# Altium PCB PHY_Demo.PcbDoc
Units mil, origin at the board's own origin, x right, y up, seen from the top; angles counter-clockwise.
Board outline 3150 x 1890 mil, 2 copper layers (Top Layer, Bottom Layer); 52 components, 54 nets, 192 pads, 43 vias.
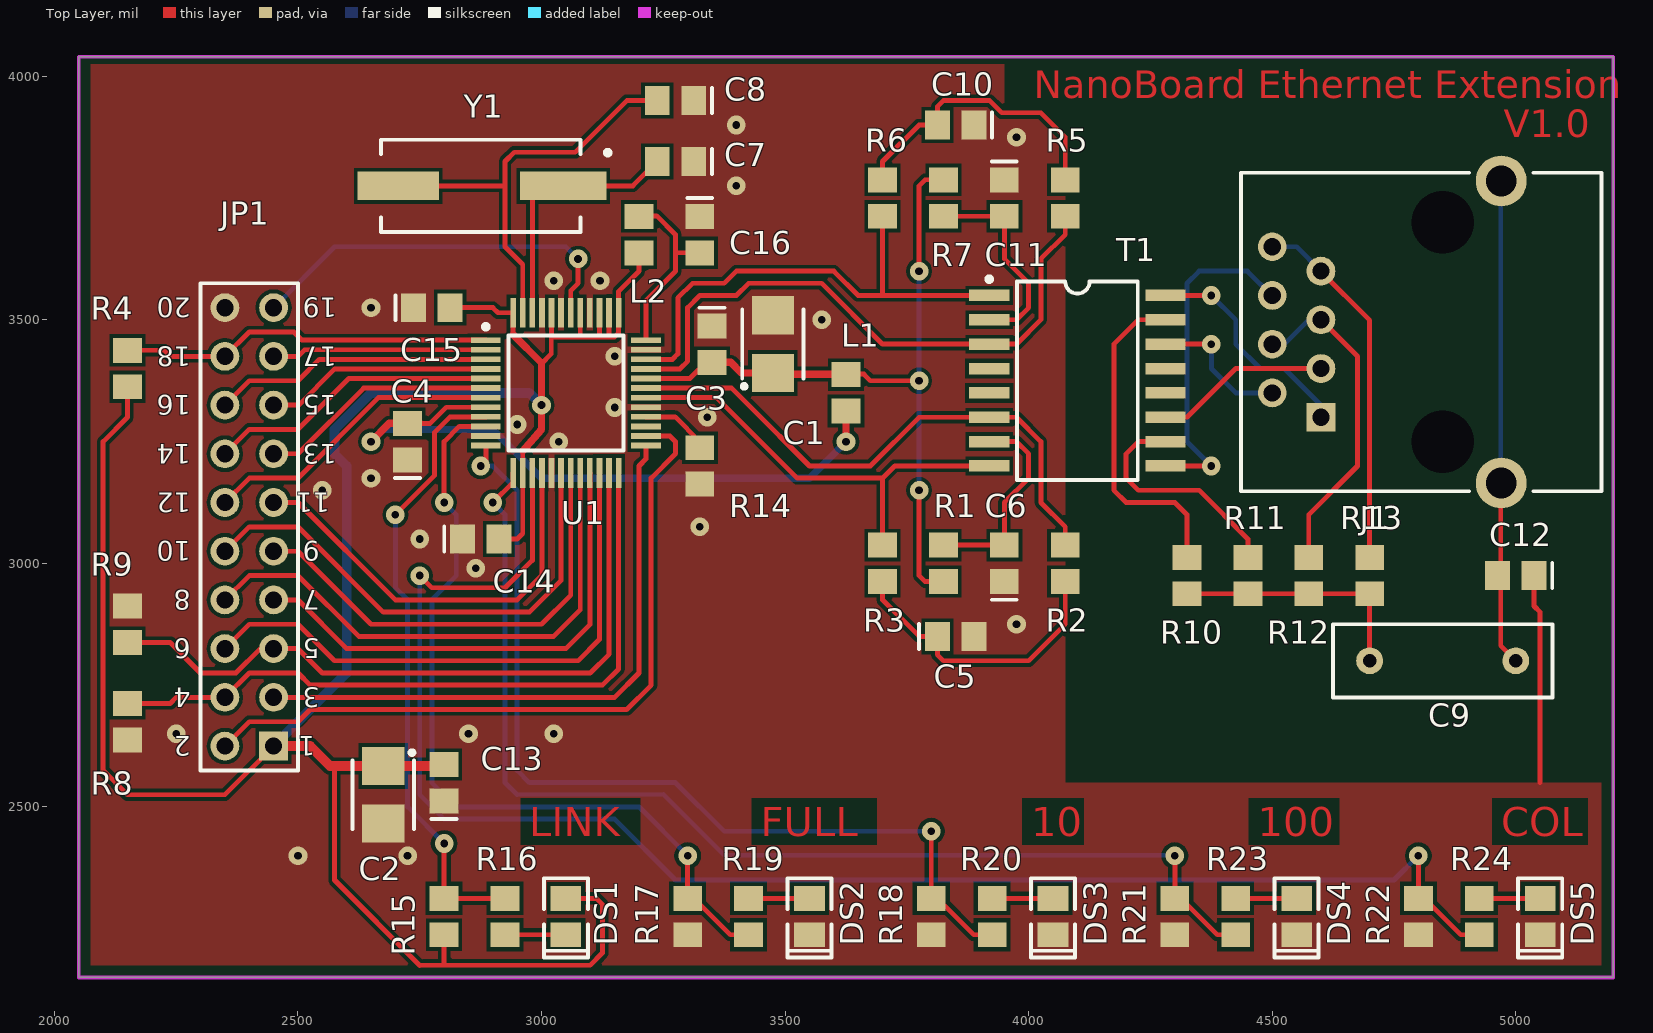
[diagram p0: Top Layer view]
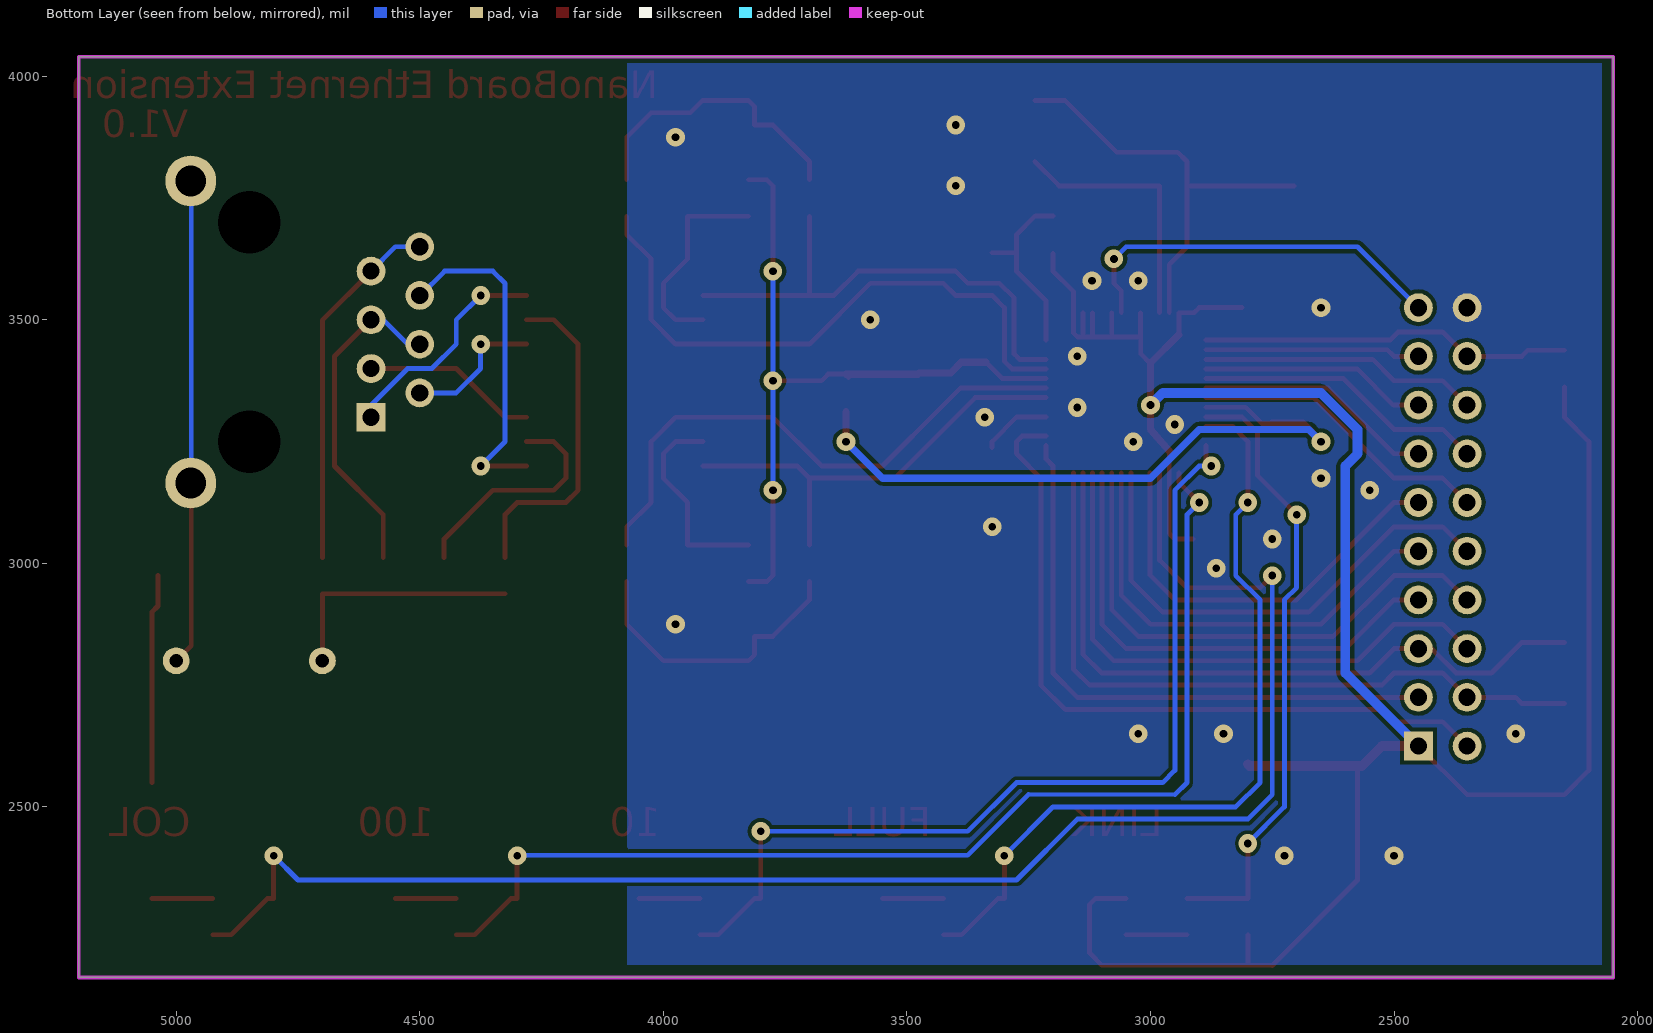
[diagram p1: Bottom Layer view, seen from below]

## Layer stack, top to bottom
Top Layer: signal copper 1.4
Dielectric: dielectric 12.6, FR-4, Dk 4.8
Bottom Layer: signal copper 1.4

## Board outline
2050,2150 2050,4040 5200,4040 5200,2150

## Design rules (kind name [scope] priority, off if disabled: settings)
Clearance Clearance_1 [(HasFootprint('TSQFP50P900X900-48'))] p1: gap=7.87
Clearance [All] p2: gap=8
ComponentClearance [All] p1: gap=8 collisioncheckmode=3 verticalgap=10 showdistances=FALSE
FabricationTestPointUsage TestPointUsage [All] p1 off: valid=0 allowmultiple=FALSE
FabricationTestpoint Testpoint [All] p1 off: side=3 testpointundercomponent=TRUE minsize=40 maxsize=100 preferedsize=60 minholesize=0 maxholesize=40 preferedholesize=32 testpointgrid=1 allowsidetop=TRUE allowsidebottom=TRUE usegrid=TRUE gridtolerance=0.01
HoleSize [All] p1: absolutevalues=TRUE maxlimit=137.79 minlimit=1 maxpercent=80.000 minpercent=20.000
PolygonConnect [All] p1: connectstyle=Direct reliefconductorwidth=10 reliefentries=4 polygonreliefangle="90 Angle"
RoomDefinition "U_Parallel Data Interface_Demo" [InComponentClass('U_Parallel Data Interface_Demo')] p1: confinementstyle=ConfineIn formatcopy=TRUE lockcomponents=FALSE outline 2050,2150 5200,2150 5200,4050 2050,4050
RoutingVias [All] p1: holewidth=15.75 width=38.19 viastyle="Through Hole" minholewidth=15.75 minwidth=38.19 maxholewidth=15.75 maxwidth=38.19
SilkscreenOverComponentPads [All] p1: minsilkscreentomaskgap=10
SolderMaskExpansion [All] p1: expansion=4
Width Width_1 [(InNet('3V3') OR InNet('GND') OR InNet('PWFBIN') OR InNet('PWFBOUT'))] p1: maxlimit=20 minlimit=5 preferedwidth=10
Width [All] p2: maxlimit=10 minlimit=10 preferedwidth=10
23 further rules are at their usual default settings.

## Classes and differential pairs
component class U_Ethernet_Con_Demo: C9 C12 J1 R10 R11 R12 R13 T1
component class "U_Parallel Data Interface_Demo": JP1 R4 R8 R9
component class U_RTL8201CL_Demo: C1 C2 C3 C4 C5 C6 C7 C8 C10 C11 C13 C14 C15 C16 L1 L2 R1 R2 R3 R5 R6 R7 R14 U1 Y1
component class U_LEDS_Demo: DS1 DS2 DS3 DS4 DS5 R15 R16 R17 R18 R19 R20 R21 R22 R23 R24
net class LED[4..0]: LED0 LED1 LED2 LED3 LED4

## Components (designator, comment, footprint, x,y, rotation, side; value= is the part's Value field where it differs from the comment)
C1 "22uF 10V" CAPC3528 3475,3450 r90 top
C2 "22uF 10V" CAPC3528 2675,2525 r270 top
C3 "100nF 50V" CAPC2012 3350,3450 r270 top
C4 "100nF 50V" CAPC2012 2725,3250 r90 top
C5 "100nF 50V" CAPC2012 3850,2850 r0 top
C6 "100nF 50V" CAPC2012 3950,3000 r90 top
C7 "20pF 50V" CAPC2012 3275,3825 r180 top
C8 "20pF 50V" CAPC2012 3275,3950 r180 top
C9 "100pF 3KV" CAPR7_5-3_6x7_5 4850,2800 r0 top
C10 "100nF 50V" CAPC2012 3850,3900 r180 top
C11 "100nF 50V" CAPC2012 3950,3750 r270 top
C12 "100nF 50V" CAPC2012 5000,2975 r180 top
C13 "100nF 50V" CAPC2012 2800,2550 r90 top
C14 "100nF 50V" CAPC2012 2875,3050 r0 top
C15 "100nF 50V" CAPC2012 2775,3525 r0 top
C16 "100nF 50V" CAPC2012 3325,3675 r270 top
DS1 "RED" LED2013 3050,2275 r90 top
DS2 "RED" LED2013 3550,2275 r90 top
DS3 "RED" LED2013 4050,2275 r90 top
DS4 "RED" LED2013 4550,2275 r90 top
DS5 "RED" LED2013 5050,2275 r90 top
J1 "RJ45 HEADER" 95122-2881 4735.04,3475 r90 top
JP1 "2x10 HEADER" HDR2X10 2450,2625 r90 top
L1 "30R@100MHz 600mA" INDC2012 3625,3350 r270 top
L2 "30R@100MHz 600mA" INDC2012 3200,3675 r90 top
R1 "0R 5%" RESC2012 3825,3000 r270 top
R2 "50R 1%" RESC2012 4075,3000 r270 top
R3 "50R 1%" RESC2012 3700,3000 r270 top
R4 "5K1 5%" RESC2012 2150,3400 r270 top
R5 "50R 1%" RESC2012 4075,3750 r270 top
R6 "50R 1%" RESC2012 3700,3750 r270 top
R7 "0R 5%" RESC2012 3825,3750 r90 top
R8 "5K1 5%" RESC2012 2150,2675 r90 top
R9 "5K1 5%" RESC2012 2150,2875 r270 top
R10 "75R 5%" RESC2012 4325,2975 r90 top
R11 "75R 5%" RESC2012 4450,2975 r90 top
R12 "75R 5%" RESC2012 4575,2975 r90 top
R13 "75R 5%" RESC2012 4700,2975 r90 top
R14 "2K 1%" RESC2012 3325,3200 r90 top
R15 "5K1 5%" RESC2012 2800,2275 r270 top
R16 "510R 5%" RESC2012 2925,2275 r270 top
R17 "5K1 5%" RESC2012 3300,2275 r90 top
R18 "5K1 5%" RESC2012 3800,2275 r270 top
R19 "510R 5%" RESC2012 3425,2275 r90 top
R20 "510R 5%" RESC2012 3925,2275 r90 top
R21 "5K1 5%" RESC2012 4300,2275 r90 top
R22 "5K1 5%" RESC2012 4800,2275 r270 top
R23 "510R 5%" RESC2012 4425,2275 r90 top
R24 "510R 5%" RESC2012 4925,2275 r90 top
T1 "TS6121C" SOIC127P910-16 4100,3375 r270 top
U1 "RTL8201CL" TSQFP50P900X900-48 3050,3350 r0 top
Y1 "25MHz" "XTAL_HC49SMD 20Mhz  +/-30ppm 20pf" 2875,3775 r180 top

## Footprints (in the part's own frame and the unit in brackets; to place one, negate y for a bottom-side part, rotate by r counter-clockwise, add the part's x,y. Pads: shape width x height; smd on the part's side, far side on the other; paste and mask are expansions set on the pad)
95122-2881 [mm]
  rect 1.5x1.5 hole 0.9: 1(-4.445,3.43)
  round 1.5 hole 0.9: 2(-3.175,5.97) 3(-1.905,3.43) 4(-0.635,5.97) 5(0.635,3.43) 6(1.905,5.97) 7(3.175,3.43) 8(4.445,5.97)
  round 2.65 hole 1.6: MH1(-7.875,-5.97) MH2(7.875,-5.97)
  round 2.95 hole 3.25 unplated: MH3(-5.715,-2.92) MH4(5.715,-2.92)
  silkscreen extent -8.3,-11.2 8.3,7.6
CAPC2012 [mm]
  rect 1.3x1.5 smd: 1(-0.95,0) 2(0.95,0)
  silkscreen extent -1.9,-0.65 -1.9,0.65
CAPC3528 [mm]
  rect 2x2.2 smd: 1(-1.5,0) 2(1.5,0)
  silkscreen extent -2.3,-1.6 1.8,1.6
CAPR7_5-3_6x7_5 [mm]
  round 1.4 hole 0.7: 1(-3.81,0) 2(3.81,0)
  silkscreen extent -5.71,-1.91 5.71,1.91
HDR2X10 [mm]
  rect 1.5x1.5 hole 0.9: 1(0,0)
  round 1.5 hole 0.9: 2(0,2.54) 3(2.54,0) 4(2.54,2.54) 5(5.08,0) 6(5.08,2.54) 7(7.62,0) 8(7.62,2.54) 9(10.16,0) 10(10.16,2.54) 11(12.7,0) 12(12.7,2.54) 13(15.24,0) 14(15.24,2.54) 15(17.78,0) 16(17.78,2.54) 17(20.32,0) 18(20.32,2.54) 19(22.86,0) 20(22.86,2.54)
  silkscreen extent -1.27,-1.27 24.13,3.81
INDC2012 [mm]
  rect 1.3x1.5 smd: 1(-0.95,0) 2(0.95,0)
LED2013 [mm]
  rect 1.3x1.6 smd: 1(0.95,0) 2(-0.95,0)
  silkscreen extent -2.13,-1.15 2,1.15
RESC2012 [mm]
  rect 1.3x1.5 smd: 1(-0.95,0) 2(0.95,0)
SOIC127P910-16 [mm]
  rect 0.6x2.1 smd: 1(-4.445,-4.6) 2(-3.175,-4.6) 3(-1.905,-4.6) 4(-0.635,-4.6) 5(0.635,-4.6) 6(1.905,-4.6) 7(3.175,-4.6) 8(4.445,-4.6) 9(4.445,4.6) 10(3.175,4.6) 11(1.905,4.6) 12(0.635,4.6) 13(-0.635,4.6) 14(-1.905,4.6) 15(-3.175,4.6) 16(-4.445,4.6)
  silkscreen extent -5.42,-4.72 5.17,3.15
TSQFP50P900X900-48 [mm]
  rect 1.55x0.3 smd: 1(-4.175,2.75) 2(-4.175,2.25) 3(-4.175,1.75) 4(-4.175,1.25) 5(-4.175,0.75) 6(-4.175,0.25) 7(-4.175,-0.25) 8(-4.175,-0.75) 9(-4.175,-1.25) 10(-4.175,-1.75) 11(-4.175,-2.25) 12(-4.175,-2.75) 25(4.175,-2.75) 26(4.175,-2.25) 27(4.175,-1.75) 28(4.175,-1.25) 29(4.175,-0.75) 30(4.175,-0.25) 31(4.175,0.25) 32(4.175,0.75) 33(4.175,1.25) 34(4.175,1.75) 35(4.175,2.25) 36(4.175,2.75)
  rect 0.3x1.55 smd: 13(-2.75,-4.175) 14(-2.25,-4.175) 15(-1.75,-4.175) 16(-1.25,-4.175) 17(-0.75,-4.175) 18(-0.25,-4.175) 19(0.25,-4.175) 20(0.75,-4.175) 21(1.25,-4.175) 22(1.75,-4.175) 23(2.25,-4.175) 24(2.75,-4.175) 37(2.75,4.175) 38(2.25,4.175) 39(1.75,4.175) 40(1.25,4.175) 41(0.75,4.175) 42(0.25,4.175) 43(-0.25,4.175) 44(-0.75,4.175) 45(-1.25,4.175) 46(-1.75,4.175) 47(-2.25,4.175) 48(-2.75,4.175)
  silkscreen extent -4.3,-3 3,3.57
"XTAL_HC49SMD 20Mhz  +/-30ppm 20pf" [mm]
  rect 4.5x1.5 smd: 1(-4.3,0)
  rect 4.25x1.5 smd: 2(4.3,0)
  silkscreen extent -6.75,-2.4 5.2,2.4

## Part data
C1 C2: "Polar Capacitor"
C3 C4 C5 C6 C7 C8 C9 C10 C11 C12 C13 C14 C15 C16: "Capacitor"
DS1 DS2 DS3 DS4 DS5: "Typical GREEN SMD LED Agilent make"
J1: "Right Angle, Standard Profile, External Shield PCB Jack"
JP1: "Header, 10-Pin, Dual row"
L1 L2: "Ferrite Bead"
R1 R2 R3 R4 R5 R6 R7 R8 R9 R10 R11 R12 R13 R14 R15 R16 R17 R18 R19 R20 R21 R22 R23 R24: "Resistor"
T1: "Bothhand 10/100 BaseT Pulse Transformer"
U1: "Realtek Ethernet PHY tranceiver"
Y1: "Surface Mount Crystal"

## Via types
v1: diameter 38.19, hole 15.75, Top Layer to Bottom Layer, 43 vias

## Nets (pads, with @x,y where several pads share a name; then routed paths per layer and width w, separated by ;. In a path a pad name is that pad's centre, name@x,y a point inside that pad or via, vN(x,y) a via of type N, cw(c..) or ccw(c..) an arc to the next point about the centre after c; other vN are vias at no path point)
3V3: C2.1 C13.2 C14.2 C15.2 DS1.1 JP1.1 L2.1 R4.2 R15.2 U1.14 U1.37 U1.38 U1.39 U1.41 U1.44 U1.48 | length 5145.4
  Top Layer w10: R4.2 2150,3300 2100,3250 2100,2575 2150,2525 2350,2525 JP1.1 ; 2575,2584.05 2575,2350 2750,2174.61 3100,2175 3124.8,2200.2 3124.8,2300 3112.4,2312.4 DS1.1 ; 2800,2175.39 R15.2 ; C15.2 2900,3525 2910.63,3514.37 U1.48 2941.73,3469.45 ; C14.2 2950,3050 2961.42,3061.42 U1.14 2961.42,3230.55 ; 3000,3410 3020,3430 3020,3465 3150,3465 3158.27,3473.27 3158.27,3558.27 3200,3600 L2.1@3200,3636.61 ; 3020.47,3465.47 U1.44 ; 3079.53,3465.47 U1.41 ; 3118.9,3466.1 U1.39 ; 3138.58,3466.42 U1.38
  Top Layer w15: 2941.73,3469.45 3000,3411.18 3000,3275 2961.42,3230.55
  Top Layer w20: JP1.1 2525,2625 2565.94,2584.06 C2.1 2796.65,2584.06 C13.2
  Bottom Layer w20: JP1.1 2600,2775 2600,3200 2575,3225 2575,3275 2650,3350 2975,3350 v1(3000,3325)
3V3A: C16.2 L2.2 U1.36 | length 382.6
  Top Layer w10: L2.2@3200,3713.39 3236.61,3713.39 3275,3675 3275,3600 3214.37,3539.37 U1.36 ; 3275.19,3637.6 C16.2
COL: JP1.18 R4.1 U1.1 | length 768.4
  Top Layer w10: R4.1 2225.2,3437.4 2237.6,3425 JP1.18 2400,3475 2491.54,3475 2508.27,3458.27 U1.1
CRS: JP1.5 R9.2 U1.23 | length 1444
  Top Layer w10: R9.2 2237.4,2837.6 2300,2775 2372.5,2775 2422.5,2825 JP1.5 2500,2825 2550,2775 3100,2775 3138.58,2813.58 U1.23
GND: C1.2 C2.2 C3.1 C4.1 C5.2 C6.1 C7.1 C8.1 C10.1 C11.1 C12.1 C13.1 C14.1 C15.1 C16.1 DS2.2 DS3.2 DS4.2 DS5.2 JP1.20 R8.1 R9.1 R14.1 R17.1 R18.2 R21.1 R22.2 U1.11 U1.17 U1.29 U1.35 U1.40 U1.43 U1.45 | length 430.2
  Top Layer w10: C12.1 5037.4,2912.6 5050,2900 5050,2550
  other v1: 2500,2400 2725,2400 2250,2650 2850,2650 3025,2650 3975,2875 2865,2990 2750,3050 3325,3075 2550,3150 2650,3175 3035,3250 2950,3285 3340,3300 3150,3320 3150,3425 3575,3500 2650,3525 3025,3580 3120,3580 3400,3775 3975,3875 3400,3900
LED0: R15.1 R16.1 U1.9 | length 1274.6
  Top Layer w10: v1(2700,3100) 2780.63,3180.63 2780.63,3269.07 2812.35,3300.79 U1.9 ; v1(2800,2425) R15.1 R16.1
  Bottom Layer w10: v1(2700,3100) 2700,2950 2725,2925 2725,2500 v1(2800,2425)
LED1: R17.2 R19.1 U1.10 | length 1660.2
  Top Layer w10: v1@2800.08,3125.08 2800.08,3250.08 2831.1,3281.1 U1.10 ; v1(3300,2400) R17.2 3312.6,2312.4 3387.4,2237.6 R19.1
  Bottom Layer w10: v1(2800,3125) 2825,3100 2825,2975 2775,2925 2775,2550 2825,2500 3200,2500 v1(3300,2400)
LED2: R18.1 R20.1 U1.12 | length 1912.2
  Top Layer w10: v1(2875,3200) 2885.63,3210.63 U1.12 ; v1(3800,2450) R18.1 3812.4,2312.4 3887.2,2237.6 R20.1
  Bottom Layer w10: v1(2875,3200) 2900,3200 2950,3150 2950,2575 2975,2550 3275,2550 3375,2450 v1(3800,2450)
LED3: R21.2 R23.1 U1.13 | length 2344
  Top Layer w10: v1(2900,3125) 2941.73,3166.73 U1.13 ; v1(4300,2400) R21.2 4312.6,2312.4 4387.4,2237.6 R23.1
  Bottom Layer w10: v1(2900,3125) 2925,3100 2925,2550 2950,2525 3250.02,2526.09 3375.02,2401.09 v1(4300,2400)
LED4: R22.1 R24.1 U1.15 | length 3281
  Top Layer w10: v1(2750,2975) 2775,2950 2925,2950 2981.1,3006.1 U1.15 ; v1(4800,2400) R22.1 4812.4,2312.4 4887.2,2237.6 R24.1
  Bottom Layer w10: v1(2750,2975) 2750,2525 2800,2475 3150,2475 3275,2350 4750,2350 v1(4800,2400)
MDC: JP1.3 U1.25 | length 1243.4
  Top Layer w10: JP1.3 3150,2725 3200,2775 3200,3200 3214.37,3214.37 U1.25
MDIO: JP1.2 U1.26 | length 1512.8
  Top Layer w10: JP1.2 2400,2675 2500,2675 2525,2700 3175,2700 3225,2750 3225,3175 3275,3225 3275,3250 3263.58,3261.42 U1.26
NetC5_1: C5.1 R2.2 R3.2 | length 605.1
  Top Layer w10: R3.2 3700,2925 3775,2850 C5.1 3812.6,2812.4 3825,2800 4000,2800 4075,2875 R2.2
NetC6_2: C6.2 R1.1 T1.7 | length 424.8
  Top Layer w10: R1.1 C6.2 3950,3125 4000,3175 4000,3225 3975,3250 T1.7
NetC7_2: C7.2 U1.46 Y1.1 | length 537.8
  Top Layer w10: U1.46 2981.1,3775 3187.6,3775 C7.2
NetC8_2: C8.2 U1.47 Y1.2 | length 909.4
  Top Layer w10: Y1.2 2925,3775 ; U1.47 2961.42,3613.58 2925,3650 2925,3825 2943.9,3843.9 3068.9,3843.9 3175,3950 C8.2
NetC9_1: C9.1 R10.1 R11.1 R12.1 R13.1 | length 512.6
  Top Layer w10: R10.1 R13.1 C9.1
NetC9_2: C9.2 C12.2 J1.MH1 J1.MH2 | length 997.8
  Top Layer w10: J1.MH1@4969.09,3164.96 4969.09,2830.91 C9.2
  Bottom Layer w10: J1.MH1@4969.09,3164.96 J1.MH2@4969.09,3785.04
NetC10_2: C10.2 R5.1 R6.1 | length 605.1
  Top Layer w10: R6.1 3700,3825 3775,3900 C10.2 3812.6,3937.6 3825,3950 3920,3950 3945,3925 4025,3925 4075,3875 R5.1
NetC11_2: C11.2 R7.1 T1.2 | length 424.8
  Top Layer w10: R7.1 C11.2 3950,3625 4000,3575 4000,3525 3975,3500 T1.2
NetDS1_2: DS1.2 R16.2 | length 125
  Top Layer w10: R16.2 DS1.2
NetDS2_1: DS2.1 R19.2 | length 125
  Top Layer w10: R19.2 DS2.1
NetDS3_1: DS3.1 R20.2 | length 125
  Top Layer w10: R20.2 DS3.1
NetDS4_1: DS4.1 R23.2 | length 125
  Top Layer w10: R23.2 DS4.1
NetDS5_1: DS5.1 R24.2 | length 125
  Top Layer w10: R24.2 DS5.1
NetJ1_1: J1.1 T1.16 | length 466
  Top Layer w10: T1.16 v1(4375,3550)
  Bottom Layer w10: v1(4375,3550) 4425,3500 4425,3450 4475,3400 4525,3400 4599.02,3325.98 J1.1@4599.02,3300
NetJ1_2: J1.2 T1.14 | length 288.6
  Top Layer w10: T1.14 v1(4375,3450)
  Bottom Layer w10: v1(4375,3450) 4375,3400 4425,3350 J1.2@4499.02,3350
NetJ1_3: J1.3 T1.11 | length 359.3
  Top Layer w10: T1.11 4325,3300 4425,3400 J1.3@4599.02,3400
NetJ1_4: J1.4 J1.5 R12.2 | length 656.8
  Top Layer w10: R12.2 4575,3100 4675,3200 4675,3425 J1.5
  Bottom Layer w10: J1.4@4499.02,3450 4525,3450 J1.5@4575,3500
NetJ1_6: J1.6 T1.9 | length 694.7
  Top Layer w10: T1.9 v1(4375,3200)
  Bottom Layer w10: v1(4375,3200) 4325,3250 4325,3575 4350,3600 4449.02,3600 J1.6@4499.02,3550
NetJ1_7: J1.7 J1.8 R13.2 | length 749.7
  Top Layer w10: J1.7@4599.02,3600 4700,3499.02 R13.2
  Bottom Layer w10: J1.8@4499.02,3650 4550,3650 J1.7@4599.02,3600.98
NetR2_1: R2.1 T1.6 U1.31 | length 1172.3
  Top Layer w10: U1.31 3390.16,3359.84 3425,3325 3550,3200 3675,3200 3775,3300 T1.6 3975,3300 4025,3250 4025,3125 4075,3075 R2.1
NetR3_1: R3.1 T1.8 U1.30 | length 920.9
  Top Layer w10: U1.30 3359.84,3340.16 3525,3175 3700,3175 ; R3.1 3700,3175 ; T1.8 3725,3200 3700,3175
NetR5_2: R5.2 T1.3 U1.33 | length 1253.7
  Top Layer w10: U1.33 3284.21,3399.21 3300,3415 3300,3525 3325,3550 3400,3550 3425,3575 3575,3575 3700,3450 T1.3 3975,3450 4025,3500 4025,3625 4075,3675 R5.2
NetR6_2: R6.2 T1.1 U1.34 | length 1030.2
  Top Layer w10: U1.34 3268.9,3418.9 3280,3430 3280,3545 3310,3575 3375,3575 3400,3600 3600,3600 3650,3550 T1.1 ; 3700,3550 R6.2
NetR10_2: R10.2 T1.15 | length 685.1
  Top Layer w10: T1.15 4225,3500 4175,3450 4175,3150 4200,3125 4300,3125 4325,3100 R10.2
NetR11_2: R11.2 T1.10 | length 480.8
  Top Layer w10: T1.10 4225,3250 4200,3225 4200,3175 4225,3150 4350,3150 4450,3050 R11.2
NetR14_2: R14.2 U1.28 | length 144.3
  Top Layer w10: U1.28 3274.21,3300.79 3325,3250 R14.2
PWFBIN: C4.2 L1.2 U1.8 | length 1384.3
  Top Layer w10: C4.2@2750,3287.4 2771.46,3287.4 2804.53,3320.47 U1.8
  Top Layer w15: v1(2650,3250) 2687.4,3287.4 C4.2@2750,3287.4 ; v1(3625,3250) L1.2@3625,3311.61
  Bottom Layer w15: v1(2650,3250) 2675,3275 2900,3275 3000,3175 3550,3175 v1(3625,3250)
PWFBOUT: C1.1 C3.2 L1.1 R1.2 R7.2 U1.32 | length 1501.1
  Top Layer w10: U1.32 3304.53,3379.53 C3.2@3337.6,3412.6 ; C1.1 C1.1@3477.56,3388.39 ; L1.1@3619.33,3380.94 L1.1@3620,3381.61 ; L1.1@3625,3388.39 3661.61,3388.39 3675,3375 v1(3775,3375) ; v1(3775,3150) 3775,2975 3787.4,2962.6 R1.2 ; v1(3775,3600) 3775,3775 3787.4,3787.4 R7.2
  Top Layer w15: C3.2@3337.6,3412.6 3388.43,3412.6 3410.08,3390.95 C1.1 ; C1.1@3477.56,3388.39 L1.1@3625,3388.39
  Bottom Layer w10: v1(3775,3150) v1(3775,3600)
RESETB: JP1.19 U1.42 | length 804
  Top Layer w10: U1.42 3059.84,3559.84 3075,3575 v1(3075,3625)
  Bottom Layer w10: JP1.19 2575,3650 3050,3650 v1(3075,3625)
RXC: JP1.11 U1.16 | length 864.5
  Top Layer w10: JP1.11 2500,3125 2700,2925 2950,2925 3000.79,2975.79 U1.16
RXD0: JP1.7 U1.21 | length 1022.4
  Top Layer w10: JP1.7 2500,2925 2600,2825 3050,2825 3099.21,2874.21 U1.21
RXD1: JP1.8 U1.20 | length 1105.7
  Top Layer w10: JP1.8 2400,2975 2500,2975 2625,2850 3025,2850 3079.53,2904.53 U1.20
RXD2: JP1.9 U1.19 | length 947.5
  Top Layer w10: JP1.9 2500,3025 2650,2875 3000,2875 3059.84,2934.84 U1.19
RXD3: JP1.10 U1.18 | length 1030.8
  Top Layer w10: JP1.10 2400,3075 2500,3075 2675,2900 2975,2900 3040.16,2965.16 U1.18
RXDV: JP1.6 U1.22 | length 1180.6
  Top Layer w10: JP1.6 2400,2875 2500,2875 2575,2800 3075,2800 3118.9,2843.9 U1.22
RXER: JP1.4 R8.2 U1.24 | length 1460.7
  Top Layer w10: R8.2 2237.6,2712.4 2250.2,2725 JP1.4 2400,2775 2500,2775 2525,2750 3125,2750 3158.27,2783.27 U1.24
TXC: JP1.12 U1.7 | length 624.8
  Top Layer w10: JP1.12 2400,3175 2500,3175 2665.16,3340.16 U1.7
TXD0: JP1.13 U1.6 | length 491.5
  Top Layer w10: JP1.13 2500,3225 2634.84,3359.84 U1.6
TXD1: JP1.14 U1.5 | length 599.6
  Top Layer w10: JP1.14 2400,3275 2500,3275 2604.53,3379.53 U1.5
TXD2: JP1.15 U1.4 | length 466.4
  Top Layer w10: JP1.15 2501.57,3325 2575.79,3399.21 U1.4
TXD3: JP1.16 U1.3 | length 574.5
  Top Layer w10: JP1.16 2400,3375 2500,3375 2543.9,3418.9 U1.3
TXEN: JP1.17 U1.2 | length 441.3
  Top Layer w10: JP1.17 2500,3425 2513.58,3438.58 U1.2
pads on no net: J1.MH3 J1.MH4 T1.4 T1.5 T1.12 T1.13 U1.27

## Polygon pours and split planes (outlines as drawn)
GND on Bottom Layer "Bottom Layer-GND" (solid, remove dead copper, pour order 1001): 2074.01,4026.39 4074.01,4026.39 4074.01,2176.39 2074.01,2176.39
GND on Top Layer "Top Layer-GND" (solid, remove dead copper, pour order 1000): 2075,4025 3950,4025 3950,3925 4050,3925 4075,3900 4075,2550 5175,2550 5175,2175 2075,2175

## Keep-outs
Keep-Out Layer:
  the board outline again, w7.87

## Other copper
Top Layer:
  text "NanoBoard Ethernet Extension" at 4010,3955 h57.09
  text "V1.0" at 4975,3875 h57.09
  text "LINK" at 2975,2440 h60
  text "FULL" at 3450,2440 h60
  text "10" at 4005,2440 h60
  text "100" at 4470,2440 h60
  text "COL" at 4970,2440 h60

## Silkscreen, mask and mechanical layers (free items; w line width, h text height)
Mechanical 1:
  the board outline again, w7.87
Drill Drawing:
  text ".Legend" at 5400,2150 h60

## Dimensions
2050,4040 to 2050,2150 on Top Layer
2050,2150 to 5200,2150 on Top Layer

## Text inside footprints (layer, text, board x,y; h text height)
JP1: Top Overlay "18" at 2280,3445 h39.37 r180; Top Overlay "17" at 2580,3445 h39.37 r180; Top Overlay "14" at 2280,3245 h39.37 r180; Top Overlay "13" at 2580,3245 h39.37 r180; Top Overlay "10" at 2280,3045 h39.37 r180; Top Overlay "9" at 2545,3045 h39.37 r180; Top Overlay "8" at 2280,2945 h39.37 r180; Top Overlay "7" at 2545,2945 h39.37 r180; Top Overlay "4" at 2280,2745 h39.37 r180; Top Overlay "3" at 2545,2745 h39.37 r180; Top Overlay "5" at 2545,2845 h39.37 r180; Top Overlay "11" at 2565,3145 h39.37 r180; Top Overlay "15" at 2580,3345 h39.37 r180; Top Overlay "6" at 2280,2845 h39.37 r180; Top Overlay "12" at 2280,3145 h39.37 r180; Top Overlay "16" at 2280,3345 h39.37 r180; Top Overlay "20" at 2280,3545 h39.37 r180; Top Overlay "19" at 2580,3545 h39.37 r180; Top Overlay "1" at 2535,2645 h39.37 r180; Top Overlay "2" at 2280,2645 h39.37 r180